# Altium PCB PCB1.PcbDoc
Units mm, origin at the board's own origin, x right, y up, seen from the top; angles counter-clockwise.
Board outline 30 x 35.6 mm, 2 copper layers (Top Layer, Bottom Layer); 45 components, 33 nets, 173 pads, 41 vias.
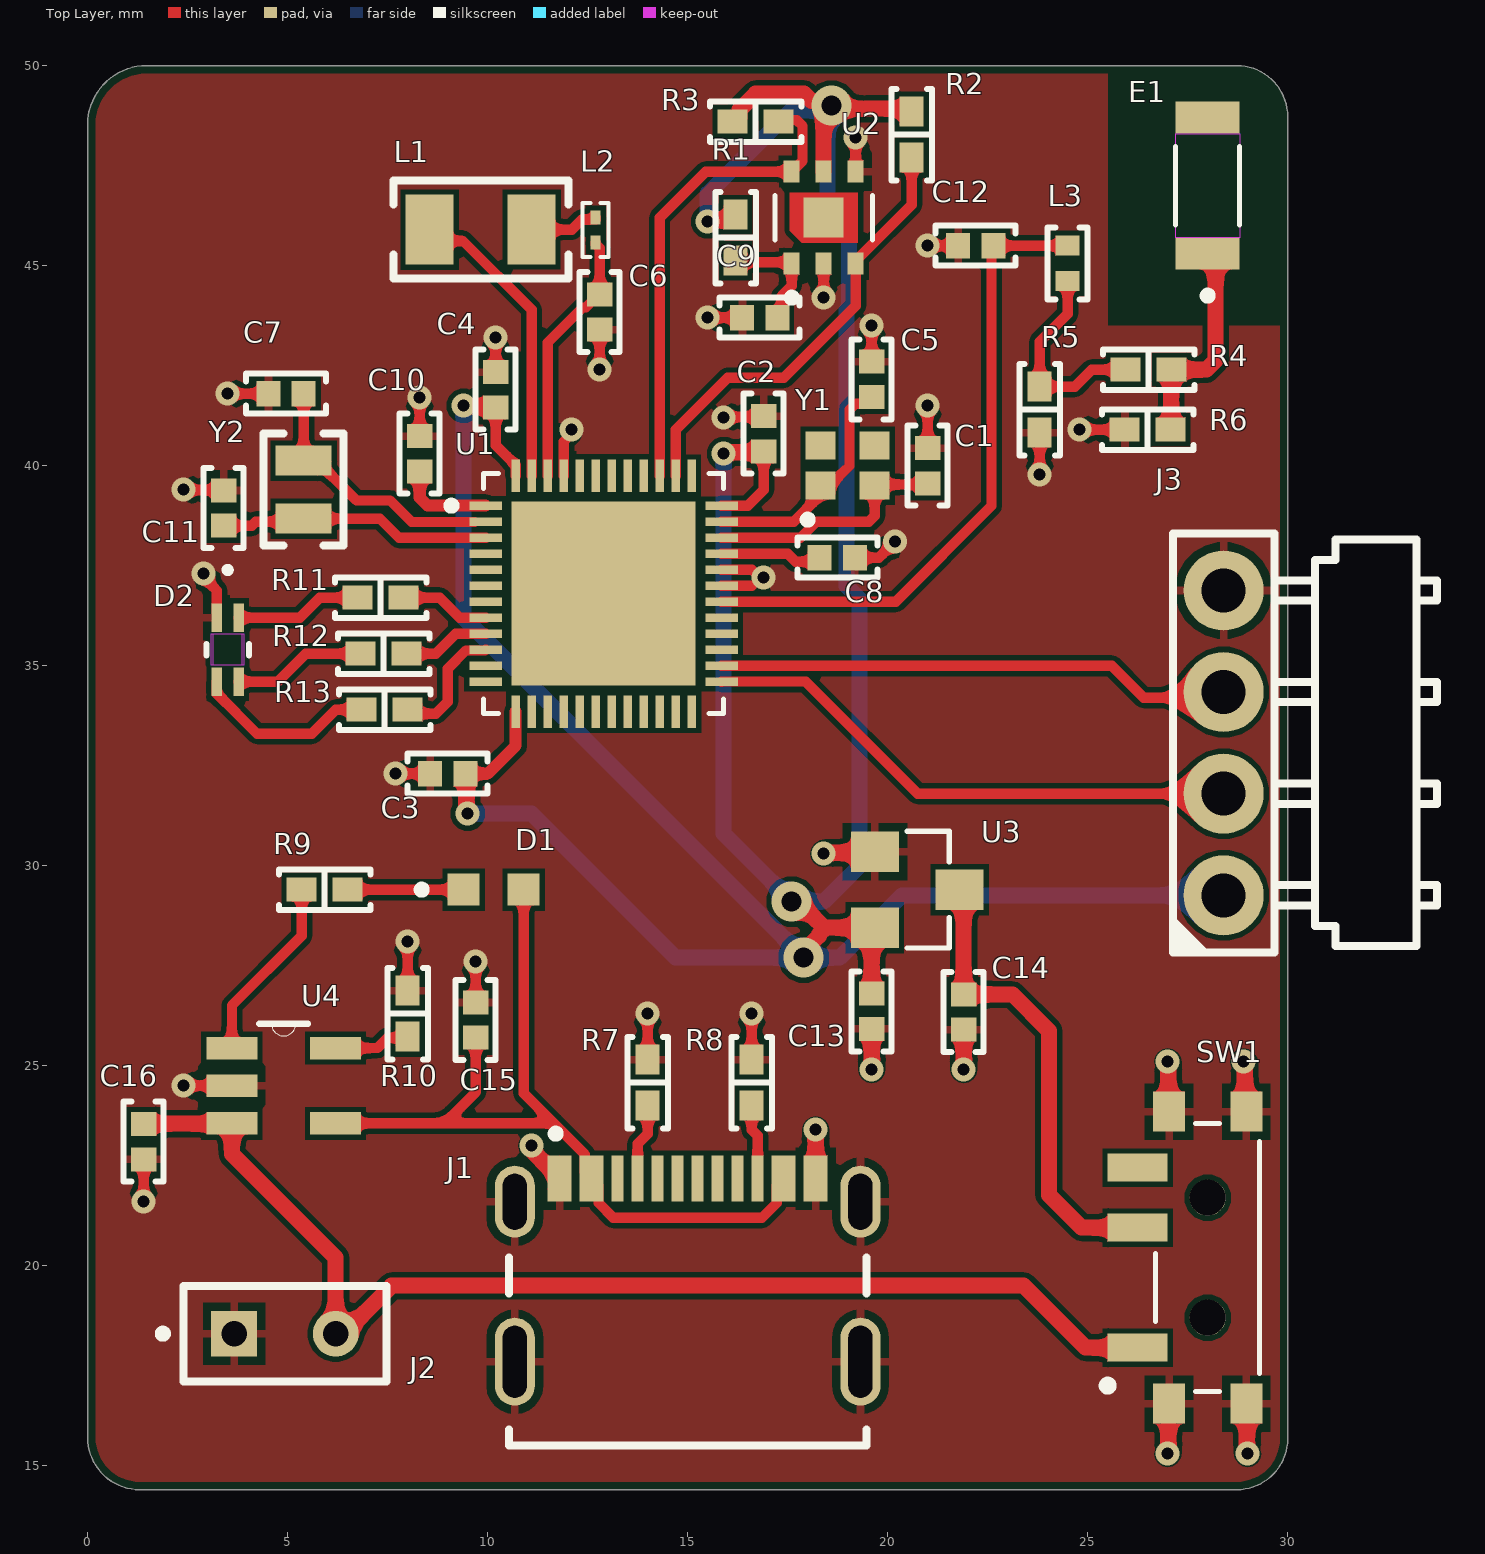
[diagram p0: Top Layer view]
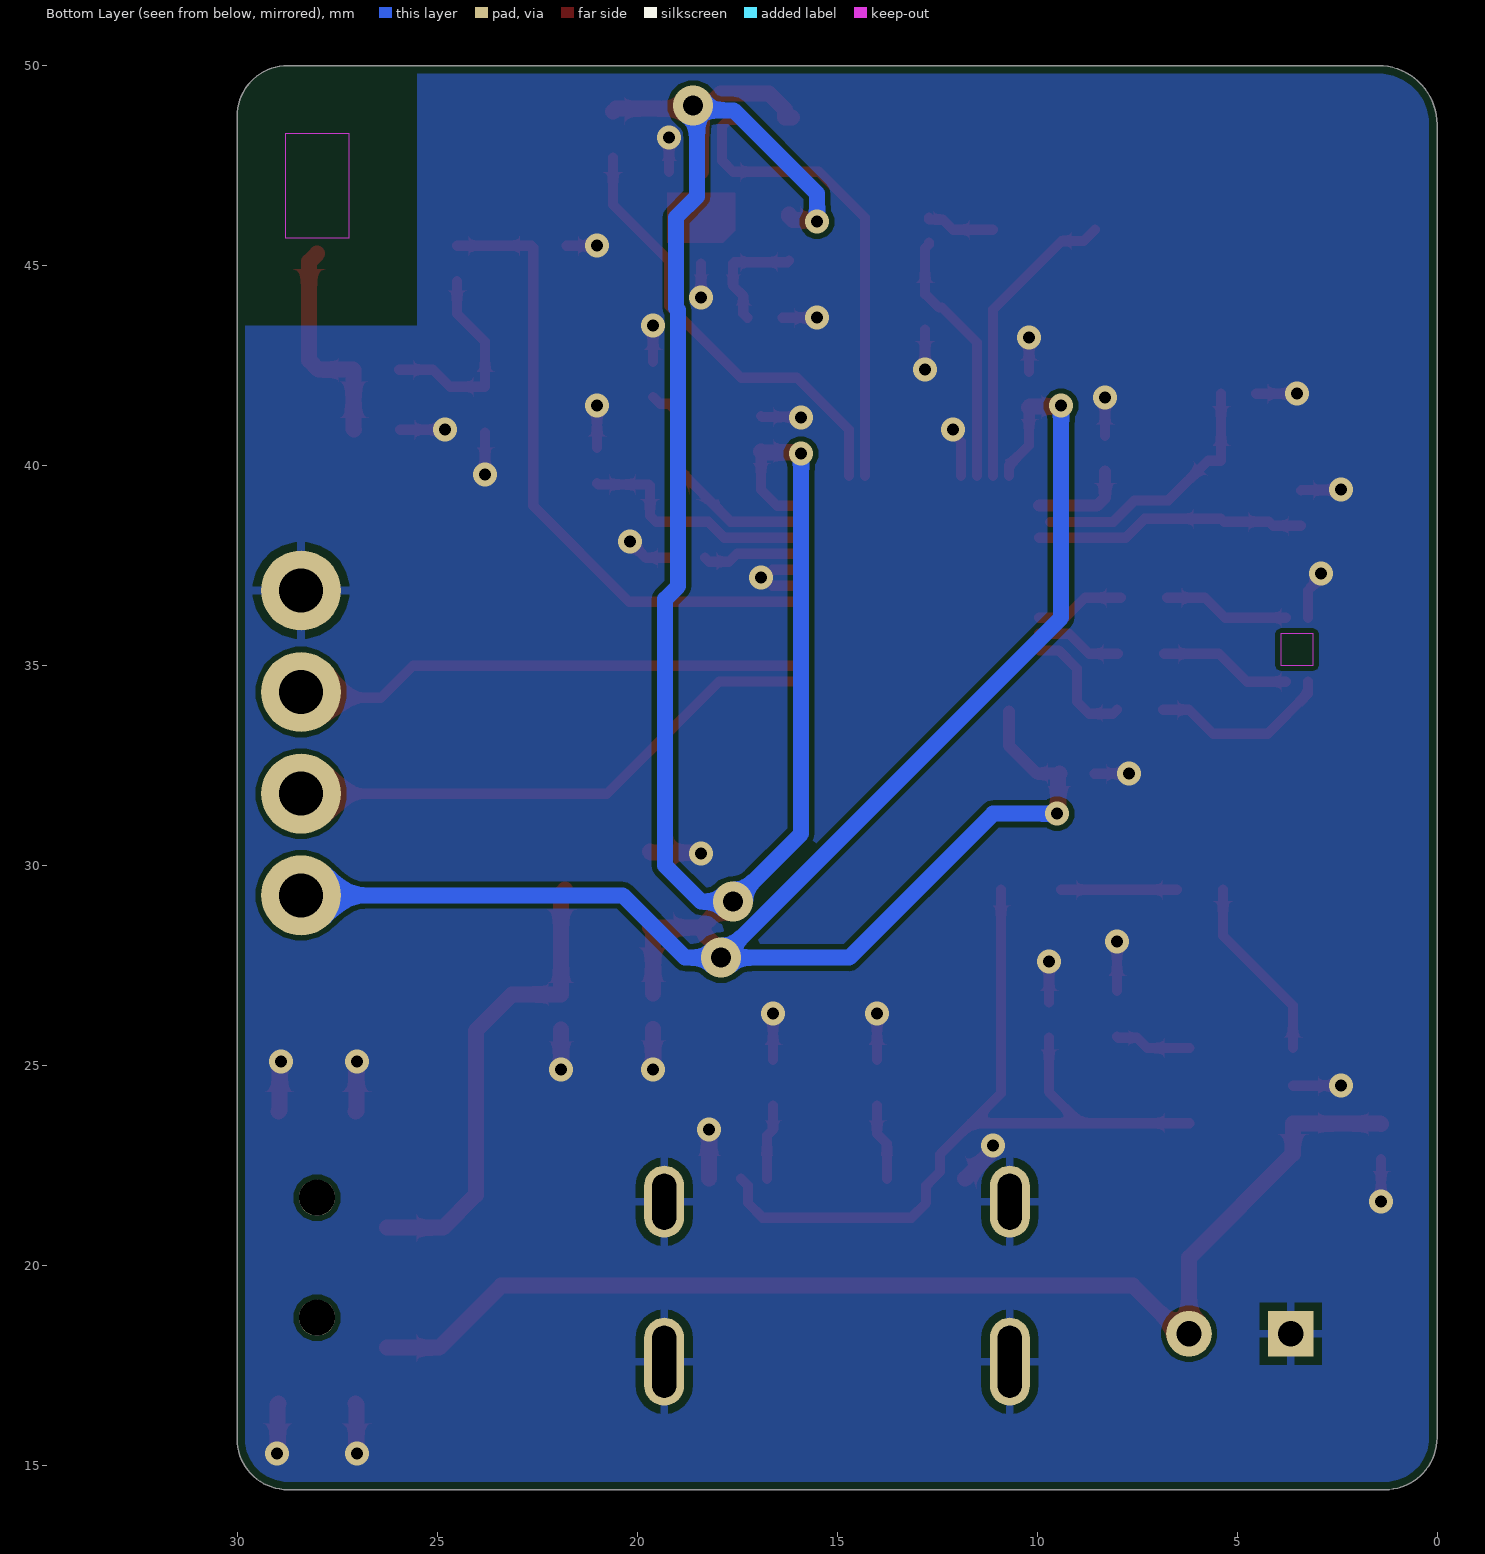
[diagram p1: Bottom Layer view, seen from below]

## Layer stack, top to bottom
Top Solder: solder mask 0.0102, Solder Resist, Dk 3.5
Top Layer: signal copper 0.0356
Dielectric 1: dielectric 0.32, FR-4, Dk 4.8
Bottom Layer: signal copper 0.0356
Bottom Solder: solder mask 0.0102, Solder Resist, Dk 3.5

## Board outline
1.3,14.4 cw(c1.3,15.7) 0,15.7 0,48.53 cw(c1.47,48.53) 1.47,50 28.73,50 cw(c28.73,48.73) 30,48.73 30,15.67 cw(c28.73,15.67) 28.73,14.4

## Design rules (kind name [scope] priority, off if disabled: settings)
BoardOutlineClearance [All] p1: gap=0.2 ignorepadtopadclearanceinfootprint=FALSE
Clearance [All] p1: gap=0.127 ignorepadtopadclearanceinfootprint=FALSE
ComponentClearance [All] p1: gap=0.127 collisioncheckmode=3 verticalgap=0.127 showdistances=TRUE
DiffPairsRouting [All] p1: maxlimit=0.381 minlimit=0.203 mostfreqgap=0.203 toplayer_minwidth=0.203 toplayer_maxwidth=25.4 toplayer_prefwidth=0.203 bottomlayer_minwidth=0.203 bottomlayer_maxwidth=25.4 bottomlayer_prefwidth=0.203 maxuncoupledlength=12.7
Height [All] p1: minheight=0 maxheight=1816.048 prefheight=12.7
HoleSize [All] p1: absolutevalues=TRUE maxlimit=6.3 minlimit=0.3 maxpercent=80.000 minpercent=20.000
HoleToHoleClearance [All] p1: gap=0.25 allowstackedmicrovias=FALSE
MinimumAnnularRing [All] p1: minimumring=0.076
MinimumSolderMaskSliver [All] p1: minsoldermaskwidth=0
PlaneClearance [All] p1: clearance=0.203
PlaneConnect PlaneConnectPowerPads [InPadClass('PowerPads')] p1: planeconnectstyle=Direct reliefexpansion=0.508 reliefentries=4 reliefconductorwidth=0.254 reliefairgap=0.254
PlaneConnect [All] p2: pad.planeconnectstyle=Relief pad.reliefexpansion=0.3 pad.reliefentries=4 pad.reliefconductorwidth=0.203 pad.reliefairgap=0.203 via.planeconnectstyle=Direct via.reliefexpansion=0.3 via.reliefentries=4 via.reliefconductorwidth=0.127 via.reliefairgap=0.127
PolygonConnect PolygonConnectPowerPads [All vs (InPadClass('PowerPads'))] p1: connectstyle=Direct reliefconductorwidth=0.254 reliefentries=4 polygonreliefangle="90 Angle" airgapwidth=0.254
PolygonConnect [All] p2: thpad.connectstyle=Relief thpad.reliefconductorwidth=0.203 thpad.reliefentries=4 thpad.polygonreliefangle="90 Angle" thpad.airgapwidth=0.203 smdpad.connectstyle=Relief smdpad.reliefconductorwidth=0.203 smdpad.reliefentries=4 smdpad.polygonreliefangle="90 Angle" smdpad.airgapwidth=0.203 via.connectstyle=Direct via.reliefconductorwidth=0.127 via.reliefentries=4 via.polygonreliefangle="90 Angle" via.airgapwidth=0.127
RoutingVias [All] p1: holewidth=0.3 width=0.6 viastyle="Through Hole" minholewidth=0.3 minwidth=0.6 maxholewidth=0.6 maxwidth=6.6
SilkToSilkClearance [All] p1: silktosilkclearance=0
SilkToSolderMaskClearance [IsPad] p1: minsilkscreentomaskgap=0.127 clearancetoexposedcopper=TRUE
SolderMaskExpansion [All] p1: expansion=0.075 istentingtop=FALSE
Width [All] p1: maxlimit=25.4 minlimit=0.203 preferedwidth=0.203 minimp=50.000000 maximp=50.000000 favimp=50.000000
20 further rules are at their usual default settings.

## Components (designator, comment, footprint, x,y, rotation, side; value= is the part's Value field where it differs from the comment)
C1 "12 pF" "CAP 0402_1005" 21,40 r270 top
C2 "0.1 µF" "CAP 0402_1005" 16.9,40.8 r90 top
C3 "0.1 µF" "CAP 0402_1005" 9,32.3 r180 top
C4 "4.7 µF" "CAP 0402_1005" 10.2,41.9 r90 top
C5 "12 pF" "CAP 0402_1005" 19.6,42.16 r90 top
C6 "1 µF" "CAP 0402_1005" 12.8,43.84 r90 top
C7 "12 pF" "CAP 0402_1005" 4.96,41.8 r0 top
C8 "100pF" "CAP 0402_1005" 18.74,37.7 r0 top
C9 "0.1 µF" "CAP 0402_1005" 16.8,43.7 r180 top
C10 "0.1 µF" "CAP 0402_1005" 8.3,40.3 r270 top
C11 "12 pF" "CAP 0402_1005" 3.4,38.94 r270 top
C12 "0.8pF" "CAP 0402_1005" 22.2,45.5 r0 top
C13 "1 µF" "CAP 0402_1005" 19.6,26.36 r90 top
C14 "1 µF" "CAP 0402_1005" 21.9,26.34 r90 top
C15 "4.7 µF" "CAP 0402_1005" 9.7,26.14 r270 top
C16 "4.7 µF" "CAP 0402_1005" 1.4,23.1 r90 top
D1 "XZFBB53W-1" XZFBB53W-1 10.15,29.4 r0 top
D2 "XL-1608RGBC" XL-1608RGBC 3.5,35.4 r270 top
E1 "2450AT18A0100001E" 2450AT18A0100001E 28,47 r90 top
J1 "USB4215-03-A" USB4215-03-A 15,17.6 r0 top
J2 "Male Header 2 Pin" "Male Header 2 Pin" 4.93,18.3 r270 top
J3 "M20-9960445" "HARWIN M20-9960445" 28.4,33.07 r90 top
L1 "10µH" "IND 1008_2520" 9.825,45.9 r0 top
L2 "15 nH" "IND 0201_0603" 12.7,45.89 r270 top
L3 "3.9nH" "IND 0402_1005" 24.5,45.06 r270 top
R1 "4.7 Ohms" "RES 0402_1005" 16.2,45.7 r90 top
R2 "4.7 kOhms" "RES 0402_1005" 20.6,48.275 r90 top
R3 "4.7 kOhms" "RES 0402_1005" 16.7,48.6 r180 top
R4 "=Value" "RES 0402_1005" 26.525,42.4 r0 top
R5 "=Value" "RES 0402_1005" 23.8,41.4 r270 top
R6 "=Value" "RES 0402_1005" 26.5,40.9 r180 top
R7 "5.1 kOhms" "RES 0402_1005" 14,24.575 r270 top
R8 "5.1 kOhms" "RES 0402_1005" 16.6,24.575 r270 top
R9 "470 Ohms" "RES 0402_1005" 5.925,29.4 r180 top
R10 "2 kOhms" "RES 0402_1005" 8,26.3 r270 top
R11 "1 kOhms" "RES 0402_1005" 7.325,36.7 r180 top
R12 "1 kOhms" "RES 0402_1005" 7.4,35.3 r0 top
R13 "1 kOhms" "RES 0402_1005" 7.425,33.9 r0 top
SW1 "PCM12SMTR" PCM12SMTR 28,20.2 r90 top
U1 "NRF52832-QFAA-R" NRF52832-QFAA-R 12.9,36.8 r0 top
U2 "SGP40-D-R4" SGP40-D-R4 18.4,46.2 r90 top
U3 "XC6206P332MR-G" SOT-23 20.74,29.4 r270 top
U4 "MCP73831T-2ACI/OT" MCP73831T-2ACI/OT 4.9,24.5 r0 top
Y1 "XRCGB32M000F2P01R0" XRCGB32M000F2P01R0 19,40 r90 top
Y2 "32.768 kHz" "ABRACON ABS06" 5.4,39.4 r90 top

## Footprints (in the part's own frame and the unit in brackets; to place one, negate y for a bottom-side part, rotate by r counter-clockwise, add the part's x,y. Pads: shape width x height; smd on the part's side, far side on the other; paste and mask are expansions set on the pad)
2450AT18A0100001E [mm]
  rect 0.8x1.6 smd: 1(-1.7,0) 2(1.7,0)
  Keep-Out Layer region: 1.3,-0.8 -1.3,-0.8 -1.3,0.8 1.3,0.8
  Keep-Out Layer region: 1.3,-0.8 -1.3,-0.8 -1.3,0.8 1.3,0.8
  silkscreen extent -2.85,-0.8 0.98,0.8, body extent -1.6,-0.8 1.6,0.8, height 1.4
"ABRACON ABS06" [mm] "Crystal, 2-Leads, Body 1.20x2.00mm, Pitch 1.50mm, IPC Medium Density"
  rect 0.75x1.4 smd: 1(-0.725,0) 2(0.725,0)
  silkscreen extent -1.4,-1 1.4,1, body extent -1.02,-0.62 1.03,0.63, height 0.6
"CAP 0402_1005" [mm] "Chip Capacitor, 2-Leads, Body 1.02x0.51mm, IPC Medium Density"
  rect 0.6x0.64 smd: 1(-0.44,0) 2(0.44,0)
  silkscreen extent -1,-0.5 1,0.5, body extent -0.5,-0.26 0.5,0.26, height 0.52
"HARWIN M20-9960445" [mm] "2.54mm DIL PC TAIL PIN HEADER ASSEMBLY"
  round 2 hole 1.1: 1(-3.81,0) 2(-1.27,0) 3(1.27,0) 4(3.81,0)
  silkscreen extent -5.24,-5.33 5.24,1.3, body extent -5.08,-10.9 5.08,0.32, height 2.54
"IND 0201_0603" [mm] "Inductor, 2-Leads, Body 0.60x0.30mm, IPC Medium Density"
  rect 0.35x0.25 smd: 1(-0.31,0) 2(0.31,0)
  silkscreen extent -0.67,-0.33 0.67,0.33, body extent -0.3,-0.15 0.3,0.15, height 0.3
"IND 0402_1005" [mm] "Inductor, 2-Leads, Body 1.02x0.51mm, IPC Medium Density"
  rect 0.5x0.6 smd: 1(-0.44,0) 2(0.44,0)
  silkscreen extent -0.9,-0.5 0.9,0.5, body extent -0.5,-0.3 0.5,0.3, height 0.6
"IND 1008_2520" [mm] "Chip Inductance, 2-leads, Body 2.5x2.1mm, IPC Medium Density"
  rect 1.2x1.75 smd: 1(-1.275,0) 2(1.275,0)
  silkscreen extent -2.18,-1.22 2.2,1.22, body extent -1.3,-1.05 1.3,1.05, height 1
"Male Header 2 Pin" [mil]
  rect 45x45 / inner round 45 / far side rect 45x45 hole 25: 01(0,-50)
  round 45 hole 25: 02(0,50)
  silkscreen extent -47,-124 47,100, body extent -47,-100 47,100, height 326
MCP73831T-2ACI/OT [mil]
  rect 50x22 smd: 1(-51,37) 2(-51,0) 3(-51,-37) 4(51,-37) 5(51,37)
  silkscreen extent -24,49 24,61, body extent -53,-57 53,57, height 57
NRF52832-QFAA-R [mm]
  rect 0.81x0.22 smd: 1(-2.95,2.2) 2(-2.95,1.8) 3(-2.95,1.4) 4(-2.95,1) 5(-2.95,0.6) 6(-2.95,0.2) 7(-2.95,-0.2) 8(-2.95,-0.6) 9(-2.95,-1) 10(-2.95,-1.4) 11(-2.95,-1.8) 12(-2.95,-2.2) 25(2.95,-2.2) 26(2.95,-1.8) 27(2.95,-1.4) 28(2.95,-1) 29(2.95,-0.6) 30(2.95,-0.2) 31(2.95,0.2) 32(2.95,0.6) 33(2.95,1) 34(2.95,1.4) 35(2.95,1.8) 36(2.95,2.2)
  rect 0.22x0.81 smd: 13(-2.2,-2.95) 14(-1.8,-2.95) 15(-1.4,-2.95) 16(-1,-2.95) 17(-0.6,-2.95) 18(-0.2,-2.95) 19(0.2,-2.95) 20(0.6,-2.95) 21(1,-2.95) 22(1.4,-2.95) 23(1.8,-2.95) 24(2.2,-2.95) 37(2.2,2.95) 38(1.8,2.95) 39(1.4,2.95) 40(1,2.95) 41(0.6,2.95) 42(0.2,2.95) 43(-0.2,2.95) 44(-0.6,2.95) 45(-1,2.95) 46(-1.4,2.95) 47(-1.8,2.95) 48(-2.2,2.95)
  rect 4.6x4.6 smd paste-3: 49(0,0)
  silkscreen extent -3.9,-3 3,3, body extent -3,-3 3,3, height 0.9
PCM12SMTR [mm]
  rect 0.7x1.5 smd: 1(-2.25,1.75) 2(0.75,1.75) 3(2.25,1.75)
  rect 1x0.8 smd: S1(-3.65,0.965) S2(-3.65,-0.965) S3(3.65,-0.965) S4(3.65,0.965)
  round 0.9 hole 0.9 unplated: ""(-1.5,0) ""(1.5,0)
  silkscreen extent -3.35,-1.3 3.35,2.6, body extent -3.86,-2.79 3.86,2.18, height 1.4
"RES 0402_1005" [mm] "Chip Resistor, 2-Leads, Body 1.0x0.5mm, IPC Medium Density"
  rect 0.75x0.6 smd: 1(-0.575,0) 2(0.575,0)
  silkscreen extent -1.14,-0.51 1.14,0.51, body extent -0.5,-0.25 0.5,0.25, height 0.35
SGP40-D-R4 [mm]
  rect 0.55x0.4 smd: 1(-1.15,0.8) 2(-1.15,0) 3(-1.15,-0.8) 4(1.15,-0.8) 5(1.15,0) 6(1.15,0.8)
  rect 1x1 smd paste-1 mask+0: 7(0,0)
  Top Layer region: 0.625,-0.85 -0.625,-0.85 -0.625,0.55 -0.325,0.85 0.625,0.85
  silkscreen extent -2.1,-1.22 0.56,1.22, body extent -1.22,-1.22 1.22,1.22, height 0.95
SOT-23 [mm]
  rect 1.016x1.2 smd: 1(-0.95,-1.06) 2(0.95,-1.06) 3(0,1.06)
  silkscreen extent -1.46,-0.25 1.46,0.8, body extent -1.45,-1.4 1.45,1.4, height 1.3
USB4215-03-A [mm]
  rect 0.6x1.15 smd: A1_B12(-3.2,4.575) A4_B9(-2.4,4.575) B1_A12(3.2,4.575) B4_A9(2.4,4.575)
  rect 0.3x1.15 smd: A5(-1.25,4.575) A6(-0.25,4.575) A7(0.25,4.575) A8(1.25,4.575) B5(1.75,4.575) B6(0.75,4.575) B7(-0.75,4.575) B8(-1.75,4.575)
  oval 1x1.8 hole 0.6 slot 1.4 at 90 deg: SH1(-4.32,4) SH2(4.32,4)
  oval 1x2.2 hole 0.6 slot 1.8 at 90 deg: SH3(-4.32,0) SH4(4.32,0)
  silkscreen extent -4.47,-2.1 4.47,5.8, body extent -4.47,-2.03 4.47,4.72, height 3.26
XL-1608RGBC [mil]
  rect 28x10 smd paste+0 mask+0: 1(-31.5,10.83) 2(31.5,10.83) 3(-31.5,-10.83) 4(31.5,-10.83)
  Top Layer keep-out region: -15.5,-14 -15.5,14 15.5,14 15.5,-14
  Keep-Out Layer region: -15.5,-16 -15.5,16 15.5,16 15.5,-16
  silkscreen extent -81,-21 5,21, body extent -31,-17 31,17, height 33
XRCGB32M000F2P01R0 [mm]
  rect 0.7x0.75 smd: 1(-0.5,0.675) 2(-0.5,-0.675) 3(0.5,-0.675) 4(0.5,0.675)
  silkscreen extent -1.45,0.9 -1.25,1.1, body extent -0.8,-1 0.8,1, height 0.7
XZFBB53W-1 [mm]
  rect 0.8x0.8 smd: A(0.75,0) C(-0.75,0)
  silkscreen extent -1.9,-0.1 -1.7,0.1, body extent -0.8,-0.4 0.8,0.4, height 0.65

## Part data
C1 C5: library part CBR04C120F5GAC, "CAP CER 12PF 50V C0G/NP0 0402", Device Package="0402 (1005 Metric)", manufacturer=KEMET, Operating Temperature="-55°C ~ 125°C", Supplier Part Number 1=399-8815-1-ND, Temperature Coefficient="C0G, NP0", Tolerance=±1%, Voltage - Rated=50V, Applications="RF, Microwave, High Frequency", Capacitance="12 pF", componentlink1description=Datasheet, componentlink1url=https://api.kemet.com/component-edge/download/datasheet/CBR04C120F5GAC.pdf, componentlink2description="DigiKey Link", componentlink2url=https://www.digikey.com/en/products/detail/kemet/CBR04C120F5GAC/3479654, Features="High Q, Low Loss, Ultra Low ESR", lastupdated="9.02.2024 20:04:38", Lifecycle Status=Active, Minimum Order=1, Mounting Type="Surface Mount, MLCC", Package / Case="0402 (1005 Metric)", packaging=TapeAndReel, Part Number=CBR04C120F5GAC, Part Status=Active, partid=1750, price=0.06, series="CBR-SMD RF C0G", Size / Dimension="0.039\" L x 0.020\" W (1.00mm x 0.50mm)", Supplier 1=DigiKey, Thickness (Max)="0.022\" (0.55mm)"
C2 C3 C9 C10: library part CL05B104KP5VPNC, "CAP CER 100NF 10V X7R 0402", Device Package="0402 (1005 Metric)", manufacturer="Samsung Electro-Mechanics", Operating Temperature="-55°C ~ 125°C", Ratings=AEC-Q200, Supplier Part Number 1=1276-CL05B104KP5VPNCCT-ND, Temperature Coefficient=X7R, Tolerance=±10%, Voltage - Rated=10V, Applications=Automotive, Capacitance="0.1 µF", componentlink1description=Datasheet, componentlink1url=https://mm.digikey.com/Volume0/opasdata/d220001/medias/docus/5458/CL05B104KP5VPNC_Spec.pdf, componentlink2description="DigiKey Link", componentlink2url=https://www.digikey.com/en/products/detail/samsung-electro-mechanics/CL05B104KP5VPNC/20498482, lastupdated="9.02.2024 20:03:17", Lifecycle Status=Active, Minimum Order=1, Mounting Type="Surface Mount, MLCC", Package / Case="0402 (1005 Metric)", packaging=TapeAndReel, Part Number=CL05B104KP5VPNC, partid=56690, price=0.01, series=CL, Size / Dimension="0.039\" L x 0.020\" W (1.00mm x 0.50mm)", Supplier 1=DigiKey, Thickness (Max)="0.022\" (0.55mm)"
C4 C15 C16: library part CL05A475MO5NUNC, "CAP CER 4.7UF 16V X5R 0402", Device Package="0402 (1005 Metric)", manufacturer="Samsung Electro-Mechanics", Operating Temperature="-55°C ~ 85°C", Supplier Part Number 1=1276-6836-1-ND, Temperature Coefficient=X5R, Tolerance=±20%, Voltage - Rated=16V, Applications="General Purpose", Capacitance="4.7 µF", componentlink1description=Datasheet, componentlink1url=http://www.samsungsem.com/kr/support/product-search/mlcc/__icsFiles/afieldfile/2019/05/29/Data%20sheet_CL05A475MO5NUNC.pdf, componentlink2description="DigiKey Link", componentlink2url=https://www.digikey.com/en/products/detail/samsung-electro-mechanics/CL05A475MO5NUNC/5961320, lastupdated="9.02.2024 20:04:38", Lifecycle Status=Active, Minimum Order=1, Mounting Type="Surface Mount, MLCC", Package / Case="0402 (1005 Metric)", packaging=TapeAndReel, Part Number=CL05A475MO5NUNC, Part Status=Active, partid=1760, price=0.08, series=CL, Size / Dimension="0.039\" L x 0.020\" W (1.00mm x 0.50mm)", Supplier 1=DigiKey, Thickness (Max)="0.028\" (0.70mm)"
C6 C13 C14: library part 885012105012, "CAP CER 1UF 10V X5R 0402", Device Package="0402 (1005 Metric)", manufacturer="Würth Elektronik", Operating Temperature="-55°C ~ 85°C", Supplier Part Number 1=732-7489-1-ND, Temperature Coefficient=X5R, Tolerance=±20%, Voltage - Rated=10V, Applications="General Purpose", Capacitance="1 µF", componentlink1description=Datasheet, componentlink1url=https://katalog.we-online.de/pbs/datasheet/885012105012.pdf, componentlink2description="DigiKey Link", componentlink2url=https://www.digikey.com/en/products/detail/würth-elektronik/885012105012/5453344, lastupdated="9.02.2024 20:04:38", Lifecycle Status=Active, Minimum Order=1, Mounting Type="Surface Mount, MLCC", Package / Case="0402 (1005 Metric)", packaging=TapeAndReel, Part Number=885012105012, Part Status=Active, partid=1807, price=0.16, series=WCAP-CSGP, Size / Dimension="0.039\" L x 0.020\" W (1.00mm x 0.50mm)", Supplier 1=DigiKey, Thickness (Max)="0.022\" (0.55mm)"
C7 C11: library part C0402C120J3GAC7867, "CAP CER 12PF 25V NP0 0402", Device Package="0402 (1005 Metric)", manufacturer=KEMET, Operating Temperature="-55°C ~ 125°C", Supplier Part Number 1=399-15295-1-ND, Temperature Coefficient="C0G, NP0", Tolerance=±5%, Voltage - Rated=25V, Applications="General Purpose", Capacitance="12 pF", componentlink1description=Datasheet, componentlink1url=https://api.kemet.com/component-edge/download/datasheet/C0402C120J3GACTU.pdf, componentlink2description="DigiKey Link", componentlink2url=https://www.digikey.com/en/products/detail/kemet/C0402C120J3GAC7867/2196267, Features="Low ESL", lastupdated="9.02.2024 20:04:32", Lifecycle Status=Active, Minimum Order=1, Mounting Type="Surface Mount, MLCC", Package / Case="0402 (1005 Metric)", packaging=TapeAndReel, Part Number=C0402C120J3GAC7867, Part Status=Active, partid=5422, price=0.04, series="SMD Comm C0G", Size / Dimension="0.039\" L x 0.020\" W (1.00mm x 0.50mm)", Supplier 1=DigiKey, Thickness (Max)="0.022\" (0.55mm)"
C8: library part 0402ZC101MAT2A, "CAP CER 100PF 10V X7R 0402", Device Package="0402 (1005 Metric)", manufacturer="AVX Corporation", Operating Temperature="-55°C ~ 125°C", Supplier Part Number 1=478-11786-1-ND, Temperature Coefficient=X7R, Tolerance=±20%, Voltage - Rated=10V, Applications="General Purpose", Capacitance=100pF, componentlink1description=Datasheet, componentlink1url=http://datasheets.avx.com/X7RDielectric.pdf, componentlink2description="DigiKey Link", componentlink2url=http://digikey.com/product-detail/en/avx-corporation/0402ZC101MAT2A/478-11786-1-ND/8573422, lastupdated="8.02.2022 12:26:58", Lifecycle Status=Active, Minimum Order=1, Mounting Type="Surface Mount, MLCC", Package / Case="0402 (1005 Metric)", packaging=TapeAndReel, Part Number=0402ZC101MAT2A, Part Status=Active, partid=1986, price=0.05, series=-, Size / Dimension="0.039\" L x 0.020\" W (1.00mm x 0.50mm)", Supplier 1=DigiKey, Thickness (Max)="0.022\" (0.56mm)"
C12: library part 04025A0R8BAT2A, "CAP CER 0.8PF 50V NP0 0402", Device Package="0402 (1005 Metric)", manufacturer="AVX Corporation", Operating Temperature="-55°C ~ 125°C", Supplier Part Number 1=478-11760-1-ND, Temperature Coefficient="C0G, NP0", Tolerance=±0.1pF, Voltage - Rated=50V, Applications="General Purpose", Capacitance=0.8pF, componentlink1description=Datasheet, componentlink1url=http://datasheets.avx.com/C0GNP0-Dielectric.pdf, componentlink2description="DigiKey Link", componentlink2url=http://digikey.com/product-detail/en/avx-corporation/04025A0R8BAT2A/478-11760-1-ND/8573396, lastupdated="8.02.2022 12:26:50", Lifecycle Status=Active, Minimum Order=1, Mounting Type="Surface Mount, MLCC", Package / Case="0402 (1005 Metric)", packaging=TapeAndReel, Part Number=04025A0R8BAT2A, Part Status=Active, partid=7022, price=0.06, series=-, Size / Dimension="0.039\" L x 0.020\" W (1.00mm x 0.50mm)", Supplier 1=DigiKey, Thickness (Max)="0.022\" (0.55mm)"
D1: "1.6X0.8MM BLUE SMD 0603 LED"
D2: "Red, Green, Blue (RGB) 625nm Red, 525nm Green, 470nm Blue LED Indication - Discrete 2.1V Red, 3.1V Green, 3.1V Blue 0603 (1608 Metric)"
E1: "2.4GHz Chip RF Antenna 2.4GHz ~ 2.5GHz 0.5dBi Solder Surface Mount"
J1: "USB-C (USB TYPE-C) USB 2.0 Receptacle Connector 24 (16+8 Dummy) Position Surface Mount, Right Angle; Through Hole"
J3: "CONN HEADER R/A 4POS 2.54MM", Current Rating (Amps)="3A per Contact", manufacturer="Harwin Inc.", Material Flammability Rating="UL94 V-0", Operating Temperature="-40°C ~ 105°C", Supplier Part Number 1=952-3286-ND, Insulation Color=Black, componentlink1description=Datasheet, componentlink1url=https://cdn.harwin.com/pdfs/Harwin_PC_Connectors_M20.pdf, componentlink2description="DigiKey Link", componentlink2url=https://www.digikey.com/en/products/detail/harwin-inc/M20-9960445/3921052, Connector Type="Header, Cuttable", Contact Finish - Mating=Gold, Contact Length - Mating="0.240\" (6.10mm)", Contact Length - Post="0.118\" (3.00mm)", Contact Material=Brass, Contact Shape=Square, Contact Type="Male Pin", Fastening Type=Push-Pull, lastupdated="21.09.2022 19:23:20", Lifecycle Status=Active, Minimum Order=1, Mounting Type="Through Hole, Right Angle", Number of Positions=4, Number of Positions Loaded=All, Number of Rows=1, packaging=Bulk, Part Number=M20-9960445, Part Status=Active, partid=167, Pitch - Mating="0.100\" (2.54mm)", price=0.11, Row Spacing - Mating="-40°C ~ 105°C", series=M20, Shrouding=Unshrouded, Style="Board to Board or Cable", Supplier 1=DigiKey, Termination=Solder, Insulation Height="0.100\" (2.54mm)", Insulation Material="Polyamide (PA6T), Nylon 6T"
L1: library part 74479887310A, "FIXED IND 10UH 850MA 300 MOHM", Current - Saturation=125mA, Current Rating (Amps)=850mA, DC Resistance (DCR)=300mOhm, Device Package="1008 (2520 Metric)", Frequency - Self Resonant=20MHz, manufacturer="Würth Elektronik", Operating Temperature="-40°C ~ 125°C", Q @ Freq="27 @ 1MHz", Supplier Part Number 1=732-4516-1-ND, Tolerance=±20%, Inductance Frequency - Test=1MHz, componentlink1description=Datasheet, componentlink1url=https://katalog.we-online.de/pbs/datasheet/74479887310A.pdf, componentlink2description="DigiKey Link", componentlink2url=http://digikey.com/product-detail/en/w-rth-elektronik/74479887310A/732-4516-1-ND/4120134, Height - Seated (Max)="0.039\" (1.00mm)", lastupdated="2.09.2020 01:29:35", Lifecycle Status=Active, Material - Core="1008 (2520 Metric)", Minimum Order=1, Mounting Type="Surface Mount", Package / Case="1008 (2520 Metric)", packaging=TapeAndReel, Part Number=74479887310A, Part Status=Active, partid=3502, price=0.80, series=WE-PMI, Shielding=Shielded, Size / Dimension="0.098\" L x 0.079\" W (2.50mm x 2.00mm)", Supplier 1=DigiKey, Supplier Device Package="1008 (2520 Metric)", Type=Multilayer, Inductance=10µH
L2: library part LQP03HQ15NJ02D, "FIXED IND 15NH 300MA 700MOHM SMD", Current Rating (Amps)="300 mA", DC Resistance (DCR)="700mOhm Max", Device Package="0201 (0603 Metric)", Frequency - Self Resonant=3.5GHz, manufacturer="Murata Electronics", Operating Temperature="-55°C ~ 125°C", Q @ Freq="20 @ 500MHz", Supplier Part Number 1=490-13863-1-ND, Tolerance=±5%, Inductance Frequency - Test="500 MHz", componentlink1description=Datasheet, componentlink1url=https://search.murata.co.jp/Ceramy/image/img/P02/JELF243C-0021.pdf, componentlink2description="DigiKey Link", componentlink2url=https://www.digikey.com/en/products/detail/murata-electronics/LQP03HQ15NJ02D/6098663, Height - Seated (Max)="0.017\" (0.42mm)", lastupdated="3.06.2024 20:08:37", Lifecycle Status=Active, Material - Core=Non-Magnetic, Minimum Order=1, Mounting Type="Surface Mount", Package / Case="0201 (0603 Metric)", packaging=TapeAndReel, Part Number=LQP03HQ15NJ02D, Part Status=Active, partid=492, price=0.04, series=LQP03, Shielding=Unshielded, Size / Dimension="0.024\" L x 0.012\" W (0.60mm x 0.30mm)", Supplier 1=DigiKey, Supplier Device Package="0201 (0603 Metric)", Type="Thick Film", Inductance="15 nH"
L3: library part BSCH001005053N9SCP, "RF INDUCTOR ML", Current Rating (Amps)=400mA, DC Resistance (DCR)="180mOhm Max", Device Package="0402 (1005 Metric)", Frequency - Self Resonant=6.1GHz, manufacturer="Chilisin Electronics", Operating Temperature="-55°C ~ 125°C", Q @ Freq="8 @ 100MHz", Supplier Device Package=0402, Supplier Part Number 1=2184-BSCH001005053N9SCPCT-ND, Tolerance=±0.3nH, Inductance Frequency - Test=100MHz, componentlink1description=Datasheet, componentlink1url=https://www.chilisin.com/upload/media/product/rf/file/BSCH_Series.pdf, componentlink2description="DigiKey Link", componentlink2url=http://digikey.com/product-detail/en/chilisin-electronics/BSCH001005053N9SCP/2184-BSCH001005053N9SCPCT-ND/10509199, lastupdated="3.06.2024 20:13:02", Lifecycle Status=Active, Material - Core=Ceramic, Minimum Order=1, Mounting Type="Surface Mount", Package / Case="0402 (1005 Metric)", packaging=Unknown, Part Number=BSCH001005053N9SCP, Part Status=Active, partid=3340, price=0.01, series=BSCH, Shielding=Unshielded, Supplier 1=DigiKey, Type=Multilayer, Inductance=3.9nH
R1: library part CRCW04024R70JNED, "RES SMD 4.7 OHM 5% 1/16W 0402", Device Package="0402 (1005 Metric)", manufacturer="Vishay Dale", Operating Temperature="-55°C ~ 155°C", Power (Watts)="0.063W, 1/16W", Ratings=AEC-Q200, Supplier Device Package=0402, Supplier Part Number 1=541-4.7JCT-ND, Temperature Coefficient=±200ppm/°C, Tolerance=±5%, componentlink1description=Datasheet, componentlink1url=http://www.vishay.com/docs/20035/dcrcwe3.pdf, componentlink2description="DigiKey Link", componentlink2url=https://www.digikey.com/en/products/detail/vishay-dale/CRCW04024R70JNED/1177512, Composition="Thick Film", Features="Automotive AEC-Q200", Height - Seated (Max)="0.016\" (0.40mm)", lastupdated="9.02.2024 20:30:14", Lifecycle Status=Active, Minimum Order=1, Number of Terminations=2, Package / Case="0402 (1005 Metric)", packaging=CutTape, Part Number=CRCW04024R70JNED, Part Status=Active, partid=4704, price=0.01, Resistance="4.7 Ohms", series=CRCW, Size / Dimension="0.039\" L x 0.020\" W (1.00mm x 0.50mm)", Supplier 1=DigiKey
R2 R3: library part RR0510P-472-D, "RES SMD 4.7K OHM 0.5% 1/16W 0402", Device Package="0402 (1005 Metric)", manufacturer=Susumu, Operating Temperature="-55°C ~ 125°C", Power (Watts)="0.063W, 1/16W", Supplier Part Number 1=RR05P4.7KDCT-ND, Temperature Coefficient=±25ppm/°C, Tolerance=±0.5%, componentlink1description=Datasheet, componentlink1url=http://www.susumu.co.jp/common/pdf/n_catalog_partition05_en.pdf, componentlink2description="DigiKey Link", componentlink2url=https://www.digikey.com/en/products/detail/susumu/RR0510P-472-D/432413, Composition="Thin Film", Height - Seated (Max)="0.016\" (0.40mm)", lastupdated="9.02.2024 20:30:21", Lifecycle Status=Active, Minimum Order=1, Number of Terminations=2, Package / Case="0402 (1005 Metric)", packaging=TapeAndReel, Part Number=RR0510P-472-D, Part Status=Active, partid=3209, price=0.01, Resistance="4.7 kOhms", series=RR, Size / Dimension="0.039\" L x 0.020\" W (1.00mm x 0.50mm)", Supplier 1=DigiKey
R4 R5 R6: library part MCS04020Z0000ZE000, "RES SMD 0 OHM JUMPER 1/10W 0402", Device Package="0402 (1005 Metric)", manufacturer="Vishay Beyschlag", Operating Temperature="-55°C ~ 155°C", Power (Watts)="0.1W, 1/10W", Supplier Device Package=0402, Supplier Part Number 1=MCS0402-0.0-ZZCT-ND, Tolerance=Jumper, componentlink1description=Datasheet, componentlink1url=http://www.vishay.com/docs/28705/mcx0x0xpro.pdf, componentlink2description="DigiKey Link", componentlink2url=http://digikey.com/product-detail/en/vishay-beyschlag/MCS04020Z0000ZE000/MCS0402-0.0-ZZCT-ND/2607873, Composition="Thin Film", Features=Anti-Sulfur, Height - Seated (Max)="0.015\" (0.37mm)", lastupdated="14.02.2022 15:04:19", Lifecycle Status=Active, Minimum Order=1, Number of Terminations=2, Package / Case="0402 (1005 Metric)", packaging=TapeAndReel, Part Number=MCS04020Z0000ZE000, Part Status=Active, partid=3160, price=0.03, series="MCS - Professional", Size / Dimension="0.039\" L x 0.020\" W (1.00mm x 0.50mm)", Supplier 1=DigiKey
R7 R8: library part ERA-2AEB512X, "RES SMD 5.1K OHM 0.1% 1/16W 0402", Device Package="0402 (1005 Metric)", manufacturer="Panasonic Electronic Components", Operating Temperature="-55°C ~ 155°C", Power (Watts)="0.063W, 1/16W", Ratings=AEC-Q200, Supplier Device Package=0402, Supplier Part Number 1=P5.1KDCCT-ND, Temperature Coefficient=±25ppm/°C, Tolerance=±0.1%, componentlink1description=Datasheet, componentlink1url=https://industrial.panasonic.com/cdbs/www-data/pdf/RDM0000/AOA0000C307.pdf, componentlink2description="DigiKey Link", componentlink2url=https://www.digikey.com/en/products/detail/panasonic-electronic-components/ERA-2AEB512X/1706022, Composition="Thin Film", Features="Automotive AEC-Q200", Height - Seated (Max)="0.016\" (0.40mm)", lastupdated="9.02.2024 20:30:08", Lifecycle Status=Active, Minimum Order=1, Number of Terminations=2, Package / Case="0402 (1005 Metric)", packaging=TapeAndReel, Part Number=ERA-2AEB512X, Part Status=Active, partid=6135, price=0.04, Resistance="5.1 kOhms", series=ERA-2A, Size / Dimension="0.039\" L x 0.020\" W (1.00mm x 0.50mm)", Supplier 1=DigiKey
R9: library part TNPW0402470RBYEP, "RES 470 OHM 0.1% 1/16W 0402", Device Package="0402 (1005 Metric)", manufacturer="Vishay Dale", Operating Temperature="-55°C ~ 155°C", Power (Watts)="0.1W, 1/10W", Ratings=AEC-Q200, Supplier Device Package=0402, Supplier Part Number 1=541-9810-1-ND, Temperature Coefficient=±10ppm/°C, Tolerance=±0.1%, componentlink1description=Datasheet, componentlink1url=http://www.vishay.com/docs/28758/tnpw_e3.pdf, componentlink2description="DigiKey Link", componentlink2url=http://digikey.com/product-detail/en/vishay-dale/TNPW0402470RBYEP/541-9810-1-ND/9562435, Composition="Thin Film", Features="Anti-Sulfur, Automotive AEC-Q200, Moisture Resistant", Height - Seated (Max)="0.016\" (0.40mm)", lastupdated="9.02.2024 20:30:21", Lifecycle Status=Active, Minimum Order=1, Number of Terminations=2, Package / Case="0402 (1005 Metric)", packaging=TapeAndReel, Part Number=TNPW0402470RBYEP, Part Status=Active, partid=3068, price=0.27, Resistance="470 Ohms", series="TNPW e3", Size / Dimension="0.039\" L x 0.020\" W (1.00mm x 0.50mm)", Supplier 1=DigiKey
R10: library part CPF0402B2K0E1, "RES SMD 2K OHM 0.1% 1/16W 0402", Device Package="0402 (1005 Metric)", manufacturer="TE Connectivity Passive Product", Operating Temperature="-55°C ~ 155°C", Power (Watts)="0.063W, 1/16W", Supplier Device Package=0402, Supplier Part Number 1=A102762CT-ND, Temperature Coefficient=±25ppm/°C, Tolerance=±0.1%, componentlink1description=Datasheet, componentlink1url=https://www.te.com/commerce/DocumentDelivery/DDEController?Action=srchrtrv&DocNm=1773200&DocType=DS&DocLang=English, componentlink2description="DigiKey Link", componentlink2url=https://www.digikey.com/en/products/detail/te-connectivity-passive-product/CPF0402B2K0E1/2381811, Composition="Thin Film", Height - Seated (Max)="0.014\" (0.35mm)", lastupdated="9.02.2024 20:30:20", Lifecycle Status=Active, Minimum Order=1, Number of Terminations=2, Package / Case="0402 (1005 Metric)", packaging=TapeAndReel, Part Number=CPF0402B2K0E1, Part Status=Active, partid=3338, price=0.13, Resistance="2 kOhms", series="CPF, Neohm", Size / Dimension="0.039\" L x 0.020\" W (1.00mm x 0.50mm)", Supplier 1=DigiKey
R11 R12 R13: library part CPF0402B1K0E, "RES SMD 1K OHM 0.1% 1/16W 0402", Device Package="0402 (1005 Metric)", manufacturer="TE Connectivity Passive Product", Operating Temperature="-55°C ~ 155°C", Power (Watts)="0.063W, 1/16W", Supplier Device Package=0402, Supplier Part Number 1=A119928CT-ND, Temperature Coefficient=±25ppm/°C, Tolerance=±0.1%, componentlink1description=Datasheet, componentlink1url=https://www.te.com/commerce/DocumentDelivery/DDEController?Action=srchrtrv&DocNm=1773200&DocType=DS&DocLang=English, componentlink2description="DigiKey Link", componentlink2url=https://www.digikey.com/en/products/detail/te-connectivity-passive-product/CPF0402B1K0E/4966468, Composition="Thin Film", Height - Seated (Max)="0.014\" (0.35mm)", lastupdated="9.02.2024 20:30:24", Lifecycle Status=Active, Minimum Order=1, Number of Terminations=2, Package / Case="0402 (1005 Metric)", packaging=TapeAndReel, Part Number=CPF0402B1K0E, Part Status=Active, partid=2470, price=0.10, Resistance="1 kOhms", series="CPF, Neohm", Size / Dimension="0.039\" L x 0.020\" W (1.00mm x 0.50mm)", Supplier 1=DigiKey
SW1: "Slide Switch SPDT Surface Mount, Right Angle"
U1: "IC RF TxRx + MCU Bluetooth, General ISM > 1GHz ANT, Bluetooth v5.0 2.4GHz 48-VFQFN Exposed Pad"
U2: "MOx based gas sensor for indoor air quality applications"
U3: "Linear Voltage Regulator IC Positive Fixed 1 Output 200mA SOT-23"
U4: "Charger IC Lithium Ion/Polymer SOT-23-5"
Y1: "32 MHz ±20ppm Crystal 8pF 100 Ohms 4-SMD, No Lead"
Y2: library part ABS06-32.768KHZ-1-T, "CRYSTAL 32.7680KHZ 12.5PF SMD", ESR (Equivalent Series Resistance)="90 kOhms", Frequency Tolerance=±10ppm, Load Capacitance=12.5pF, manufacturer="Abracon LLC", Operating Mode=Fundamental, Operating Temperature="-40°C ~ 85°C", Package / Case="2-SMD, No Lead", Supplier Part Number 1=535-10248-1-ND, componentlink1description=Datasheet, componentlink1url=https://abracon.com/Resonators/ABS06.pdf, componentlink2description="DigiKey Link", componentlink2url=https://www.digikey.com/en/products/detail/abracon-llc/ABS06-32-768KHZ-1-T/2217994, Frequency="32.768 kHz", Height - Seated (Max)="0.024\" (0.60mm)", lastupdated="3.06.2024 20:02:03", Lifecycle Status=Active, Minimum Order=1, Mounting Type="Surface Mount", packaging=TapeAndReel, Part Number=ABS06-32.768KHZ-1-T, Part Status=Active, partid=370, price=0.33, series=ABS06, Size / Dimension="0.079\" L x 0.047\" W (2.00mm x 1.20mm)", Supplier 1=DigiKey, Type="kHz Crystal (Tuning Fork)"

## Via types
v1: diameter 0.6, hole 0.3, Top Layer to Bottom Layer, tented both sides, 38 vias
v2: diameter 1, hole 0.5, Top Layer to Bottom Layer, tented both sides, 3 vias

## Nets (pads, with @x,y where several pads share a name; then routed paths per layer and width w, separated by ;. In a path a pad name is that pad's centre, name@x,y a point inside that pad or via, vN(x,y) a via of type N, cw(c..) or ccw(c..) an arc to the next point about the centre after c; other vN are vias at no path point)
3.3V: C2.1 C3.1 C4.1 C13.2 J3.1 R1.2 R2.2 R3.2 U1.13 U1.36 U1.48 U2.5 U3.2 | length 98.1
  Top Layer w0.254: C4.1 10.2,40.511 10.7,40.011 U1.48 ; U1.36 16.5,39 16.9,39.4 C2.1
  Top Layer w0.3: C3.1 10,32.3 10.7,33 U1.13
  Top Layer w0.4: v1(9.4,41.5) 9.42,41.48 10.18,41.48 C4.1 ; C3.1 9.47,32.27 9.47,31.33 v1(9.5,31.3) ; v1(15.5,46.1) 15.538,46.138 16.1,46.138 16.2,46.238 R1.2 ; v1(15.9,40.3) 15.93,40.33 16.87,40.33 C2.1 ; R3.2@16.125,48.7 16.3,48.7 16.3,48.9 16.7,49.3 17.912,49.3 18.098,49.115 18.323,49.115 18.6,48.838 18.4,48.638 U2.5 ; v2(17.6,29.1) 17.762,29.1 18.412,28.45 18.45,28.45 ; v2(17.9,27.7) 17.9,27.862 18.283,28.245 18.283,28.283 18.45,28.45 ; v2@18.601,48.918 19.448,48.918 19.455,48.925 20.525,48.925 R2.2 ; C13.2 U3.2@19.6,28.37 ; U3.2 18.45,28.45
  Bottom Layer w0.4: v1(9.4,41.5) 9.4,36.2 v2(17.9,27.7) ; v1(9.5,31.3) 11.1,31.3 14.7,27.7 v2(17.9,27.7) ; v1(15.5,46.1) 15.5,46.8 17.585,48.885 18.485,48.885 v2(18.6,49) 18.5,48.9 18.5,46.732 19.027,46.205 19.027,43.94 18.973,43.886 18.973,36.99 19.3,36.663 19.3,30 18.4,29.1 v2(17.6,29.1) 15.9,30.8 v1(15.9,40.3) ; J3.1 20.36,29.26 18.8,27.7 v2(17.9,27.7)
BLUE_GPIO: R13.2 U1.10 | length 3.1
  Top Layer w0.254: R13.2 8.1,33.8 8.7,33.8 9,34.1 9,34.924 9.459,35.383 9.933,35.383 U1.10
GND: C1.1 C2.2 C3.2 C4.2 C5.2 C6.1 C7.1 C8.2 C9.2 C10.1 C11.1 C12.1 C13.1 C14.1 C15.1 C16.1 D2.3 J1.A1_B12 J1.B1_A12 J1.SH1 J1.SH2 J1.SH3 J1.SH4 J2.01 J3.4 R5.2 R6.2 R7.1 R8.1 R10.1 SW1.S1 SW1.S2 SW1.S3 SW1.S4 U1.31 U1.32 U1.45 U2.2 U2.4 U3.1 U4.2 | length 37.2
  Top Layer w0.254: v1(1.4,21.6) C16.1 ; v1(2.4,24.5) U4.2 ; v1(2.4,39.4) 2.41,39.39 3.39,39.39 C11.1 ; v1(2.9,37.3) 2.9,37.206 3.225,36.881 D2.3 ; v1(3.5,41.8) C7.1 ; v1(7.7,32.3) C3.2 ; R10.1 v1(8,28.1) ; C10.1 v1(8.3,41.7) ; C15.1 v1(9.7,27.6) ; C4.2 v1(10.2,43.2) ; U1.45 11.9,40.606 12.1,40.806 v1(12.1,40.9) ; v1(12.8,42.4) C6.1 ; R7.1 v1(14,26.3) ; v1(15.5,43.7) C9.2 ; U1.31 16.606,37 ; U1.32 16.606,37.4 16.806,37.2 v1(16.9,37.2) ; v1(15.9,41.2) 15.92,41.22 16.88,41.22 C2.2 ; R8.1 v1(16.6,26.3) ; v1(18.4,44.2) U2.2 ; C8.2 19.78,37.7 v1(20.18,38.1) ; U2.4 v1(19.2,48.2) ; C5.2 v1(19.6,43.5) ; C1.1 v1(21,41.5) ; v1(21,45.5) C12.1 ; v1(23.8,39.775) R5.2 ; v1(24.8,40.9) R6.2
  Top Layer w0.4: v1(11.1,23) ccw(c11.402,23) 11.188,22.787 J1.A1_B12 ; J1.B1_A12 v1(18.2,23.4) ; v1(18.4,30.3) 18.425,30.325 19.655,30.325 U3.1 ; v1(19.6,24.9) C13.1 ; v1(21.9,24.9) C14.1 ; v1(27,15.3) 27.017,15.318 27.017,16.532 SW1.S1 ; v1(27,25.1) 27.017,25.082 27.017,23.868 SW1.S4 ; v1(28.9,25.1) 28.932,25.068 28.932,23.882 SW1.S3 ; SW1.S2 28.982,16.532 28.982,15.318 v1(29,15.3)
GREEN_GPIO: R12.2 U1.9 | length 2.2
  Top Layer w0.254: R12.2 8.7,35.3 9.2,35.8 U1.9
NetC1_2: C1.2 U1.34 Y1.2 | length 6.2
  Top Layer w0.254: U1.34 17.821,38.2 18.221,38.6 19.526,38.6 19.675,38.749 Y1.2 19.705,39.53 20.97,39.53 C1.2
NetC5_1: C5.1 U1.35 Y1.1 | length 5.9
  Top Layer w0.254: U1.35 17.656,38.6 19.046,39.99 19.046,41.398 19.195,41.547 19.427,41.547 C5.1
NetC6_2: C6.2 L2.2 U1.46 | length 6.5
  Top Layer w0.254: U1.46 11.5,43.079 12.375,43.954 12.454,43.954 12.78,44.28 C6.2 12.8,45.434 12.7,45.534 L2.2
NetC7_2: C7.2 U1.2 Y2.2 | length 6.6
  Top Layer w0.254: C7.2 Y2.2 5.725,40.125 6.718,39.132 7.56,39.132 8.096,38.596 U1.2@9.672,38.596
NetC8_1: C8.1 U1.33 | length 2.6
  Top Layer w0.254: U1.33 17.5,37.8 17.7,37.6 18.2,37.6 C8.1
NetC9_1: C9.1 R1.1 U2.1 | length 2.9
  Top Layer w0.254: R1.1 16.238,45.087 17.562,45.087 U2.1 17.6,44.5 17.345,44.245 17.345,43.805 C9.1
NetC10_2: C10.2 U1.1 | length 2.4
  Top Layer w0.3: C10.2 8.3,39.2 8.5,39 U1.1
NetC11_2: C11.2 U1.3 Y2.1 | length 6.8
  Top Layer w0.254: C11.2 4.1,38.5 4.2,38.6 5.325,38.6 Y2.1 7.306,38.675 7.781,38.2 U1.3
NetC12_2: C12.2 L3.1 U1.30 | length 16.1
  Top Layer w0.254: U1.30 20.2,36.6 22.596,38.996 22.596,45.456 C12.2 L3.1
NetC16_2: C16.2 J2.02 SW1.1 U4.3 | length 29.7
  Top Layer w0.4: C16.2 1.41,23.55 3.595,23.55 U4.3 3.605,22.795 6.2,20.2 J2.02 6.401,18.3 7.601,19.5 23.4,19.5 24.95,17.95 SW1.1
NetD1_C: D1.C R9.1 | length 2.9
  Top Layer w0.254: R9.1 D1.C
NetD2_1: D2.1 R11.2 | length 3.2
  Top Layer w0.254: D2.1 5.3,36.2 5.8,36.7 R11.2
NetD2_2: D2.2 R12.1 | length 3.3
  Top Layer w0.254: D2.2 4.75,34.6 5.45,35.3 R12.1
NetD2_4: D2.4 R13.1 | length 4.6
  Top Layer w0.254: D2.4 3.225,34.308 4.233,33.3 5.6,33.3 6.2,33.9 R13.1
NetE1_1: E1.1 R4.2 R6.1 | length 5.5
  Top Layer w0.4: R6.1 27.087,40.912 27.087,42.387 R4.2 27.966,42.4 28.2,42.634 28.2,45.1 E1.1
NetJ1_A5: J1.A5 R7.2 | length 1.9
  Top Layer w0.254: J1.A5 13.75,23.05 14,23.3 R7.2
NetJ1_B5: J1.B5 R8.2 | length 1.9
  Top Layer w0.254: R8.2 16.6,23.4 16.75,23.25 J1.B5
NetL1_1: L1.1 U1.47 | length 7.5
  Top Layer w0.254: L1.1 8.832,45.618 9.382,45.618 11.1,43.9 U1.47
NetL1_2: L1.2 L2.1 | length 1.8
  Top Layer w0.254: L1.2 12.1,45.9 12.352,46.152 12.698,46.152 12.7,46.154 L2.1
NetR9_2: R9.2 U4.1 | length 4.7
  Top Layer w0.254: U4.1 3.605,26.505 5.35,28.25 R9.2
NetR10_2: R10.2 U4.5 | length 1.9
  Top Layer w0.254: U4.5 7.24,25.44 7.5,25.7 7.975,25.7 R10.2
RED_GPIO: R11.1 U1.8 | length 2.3
  Top Layer w0.254: R11.1 8.8,36.7 9.3,36.2 U1.8
RF: L3.2 R4.1 R5.1 | length 5.3
  Top Layer w0.254: L3.2 24.5,43.8 23.8,43.1 R5.1 24.675,41.975 25.1,42.4 R4.1
SCL: R3.1 U1.39 U2.6 | length 12.1
  Top Layer w0.254: U1.39 14.3,46.2 15.45,47.35 U2.6 17.874,47.624 17.874,48.49 17.725,48.639 17.523,48.639 R3.1
SDA: R2.1 U1.38 U2.3 | length 11.2
  Top Layer w0.254: U1.38 14.7,40.9 16,42.2 17.4,42.2 19.2,44 U2.3 19.2,45.125 20.6,46.525 R2.1
SWDCLK: J3.2 U1.25 | length 13.7
  Top Layer w0.254: U1.25 17.951,34.601 20.752,31.8 J3.2
SWDIO: J3.3 U1.26 | length 12.9
  Top Layer w0.254: U1.26 25.6,35 26.4,34.2 28.26,34.2 J3.3
VCC: C14.2 SW1.2 U3.3 | length 11.8
  Top Layer w0.4: U3.3 21.9,29.3 C14.2 ; C14.2@21.92,26.78 23.12,26.78 24.028,25.872 24.028,21.772 24.85,20.95 SW1.2
VUSB: C15.2 D1.A J1.A4_B9 J1.B4_A9 U4.4 | length 22
  Top Layer w0.254: U4.4 8.922,23.56 ; C15.2 9.7,24.338 8.922,23.56 ; D1.A 10.9,24.309 11.649,23.56 ; J1.B4_A9 17.227,22.002 17.227,21.568 16.859,21.2 13.141,21.2 12.773,21.568 12.773,22.002 J1.A4_B9 12.427,22.348 12.427,22.782 11.649,23.56 ; 8.922,23.56 11.649,23.56
pads on no net: E1.2 J1.A6 J1.A7 J1.A8 J1.B6 J1.B7 J1.B8 SW1. SW1.3 U1.4 U1.5 U1.6 U1.7 U1.11 U1.12 U1.14 U1.15 U1.16 U1.17 U1.18 U1.19 U1.20 U1.21 U1.22 U1.23 U1.24 U1.27 U1.28 U1.29 U1.37 U1.40 U1.41 U1.42 U1.43 U1.44 U1.49 U2.7 Y1.3 Y1.4

## Polygon pours and split planes (outlines as drawn)
GND on Top Layer "GND_L01_P000" (solid, pour order 0): 0,48.5 cw(c1.5,48.5) 1.5,50 25.3,50 cw(c25.3,49.8) 25.5,49.8 25.5,43.5 30,43.5 30,15.7 cw(c28.7,15.7) 28.7,14.4 1.4,14.4 cw(c1.4,15.8) 0,15.8
GND on Bottom Layer "GND_L02_P001" (solid, pour order 1): 0,48.5 cw(c1.5,48.5) 1.5,50 25.3,50 cw(c25.3,49.8) 25.5,49.8 25.5,43.5 30,43.5 30,15.7 cw(c28.7,15.7) 28.7,14.4 1.4,14.4 cw(c1.4,15.8) 0,15.8